# EAGLE board main (EAGLE 6.1)
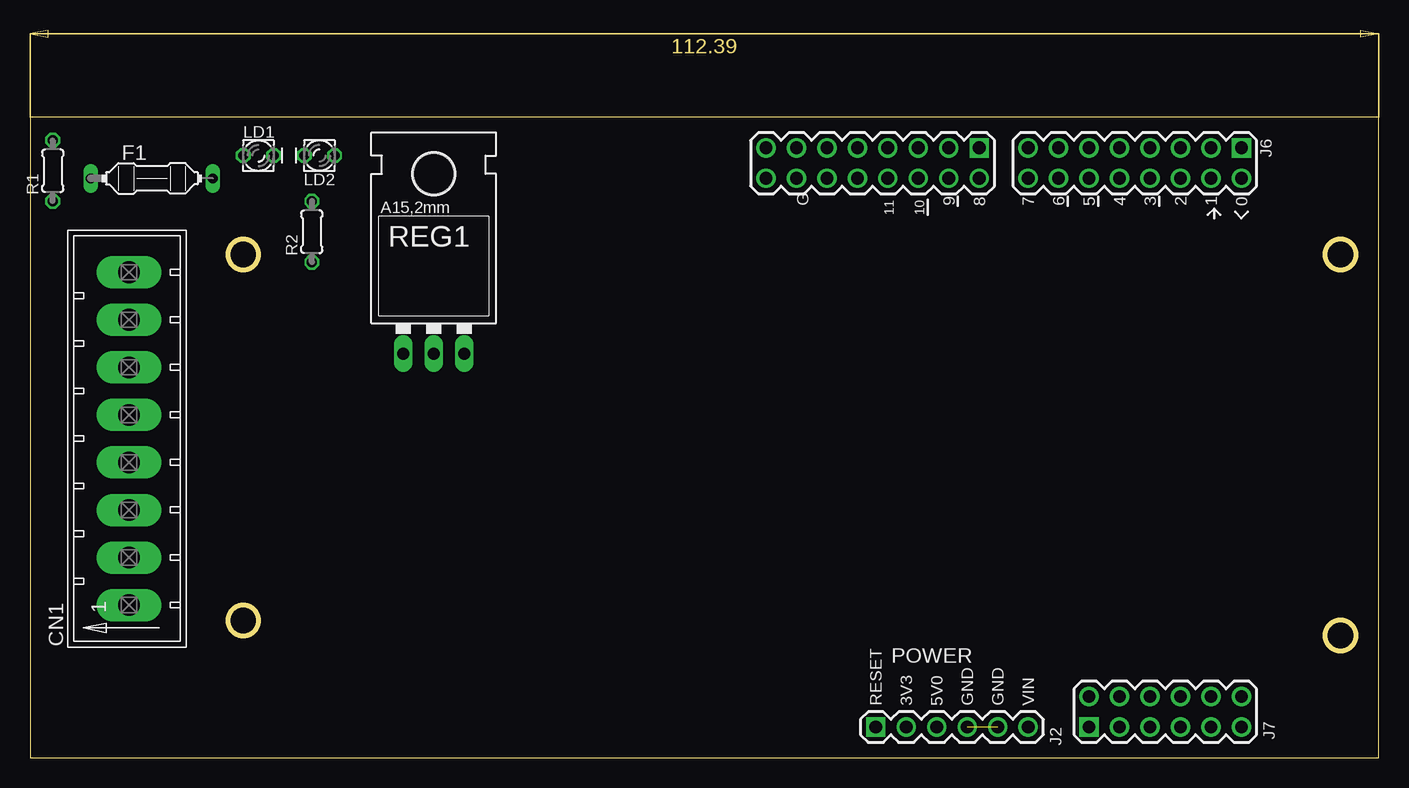
[diagram p0: board, top side]
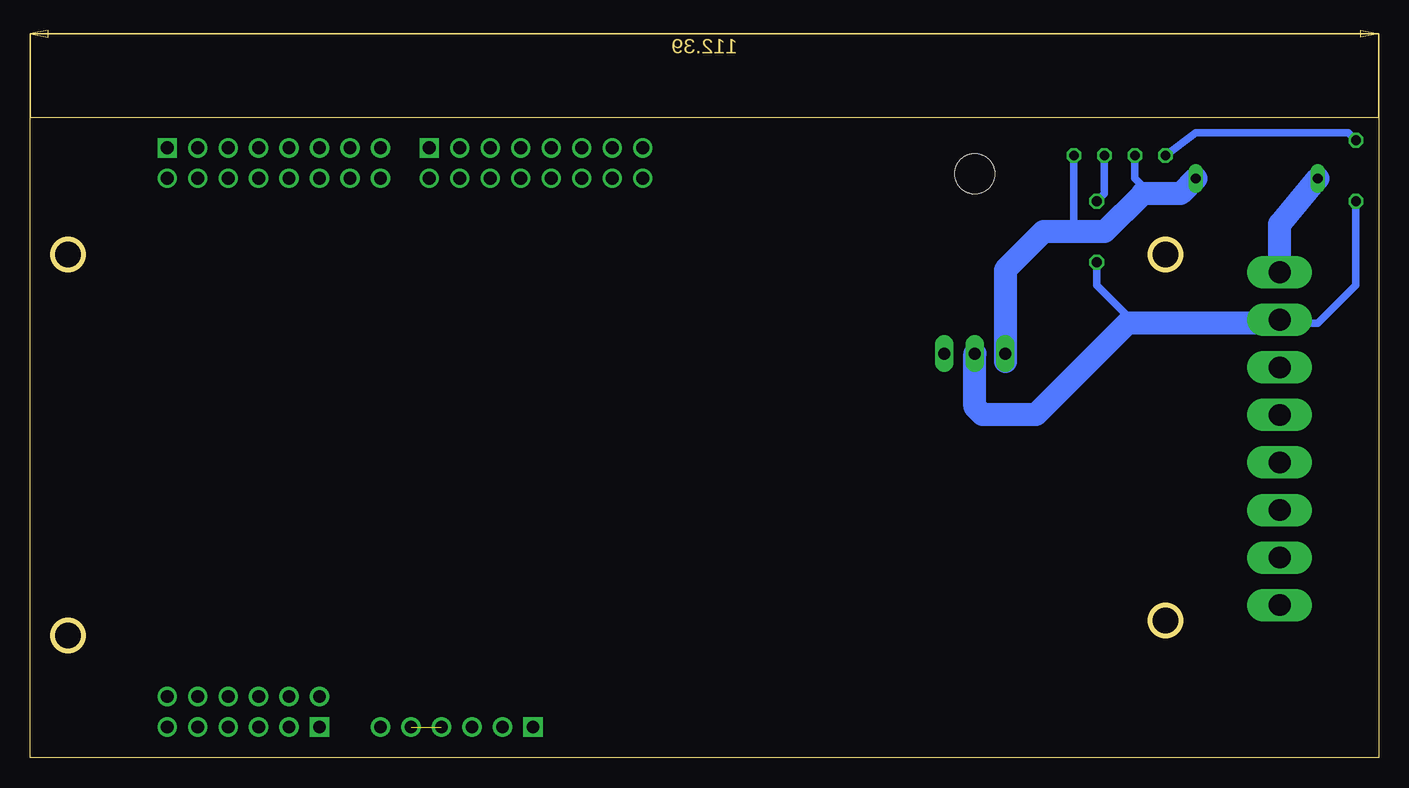
[diagram p1: board, bottom side, seen from below]

Size 112.39 x 53.34 mm. Coordinates in mm from the lower left corner, seen from the top.
Outline: 0,0 112.39,0 112.39,53.34 0,53.34 0,0
Outline: circle at 17.77,11.43 radius 1.27
Outline: circle at 17.77,41.91 radius 1.27
Outline: circle at 109.21,41.91 radius 1.27
Outline: circle at 109.21,10.16 radius 1.27
Copper layers (1+2*15+16): Top 0.035mm / dielectric 0.2mm / Route2 0.035mm / dielectric 0.2mm / Route15 0.035mm / dielectric 0.2mm / Bottom 0.035mm
Design rules: minimum track width 8mil, minimum drill 0.3mm, track to track 6mil, track to pad 6mil, pad to pad 6mil, via to via 6mil, smd to smd 0mil, copper to edge 10mil, drill to drill 8mil, minimum pad ring 5mil, minimum via ring 5mil, stop-mask expansion 4mil, vias tented up to drill 15mil, thermal gap 6mil

## Footprints (pad centres in the part's own frame; a part is rotated, then mirrored left to right if it is on the bottom)
MT6-8 = drill 1.803 long: 1 2.54,0; 2 6.502,0; 3 10.465,0; 4 14.427,0; 5 18.39,0; 6 22.352,0; 7 26.314,0; 8 30.277,0
PICOFUSE = drill 0.813 long: 1 -5.08,0; 2 5.08,0
HDR-1X6 = drill 1.067 square: 1 0,6.35 | drill 1.067: 2 0,3.81; 3 0,1.27; 4 0,-1.27; 5 0,-3.81; 6 0,-6.35
HDR-2X8 = drill 1.067 square: 1 -1.27,8.89 | drill 1.067: 2 1.27,8.89; 3 -1.27,6.35; 4 1.27,6.35; 5 -1.27,3.81; 6 1.27,3.81; 7 -1.27,1.27; 8 1.27,1.27; 9 -1.27,-1.27; 10 1.27,-1.27; 11 -1.27,-3.81; 12 1.27,-3.81; 13 -1.27,-6.35; 14 1.27,-6.35; 15 -1.27,-8.89; 16 1.27,-8.89
HDR-2X6 = drill 1.067 square: 1 -1.27,6.35 | drill 1.067: 2 1.27,6.35; 3 -1.27,3.81; 4 1.27,3.81; 5 -1.27,1.27; 6 1.27,1.27; 7 -1.27,-1.27; 8 1.27,-1.27; 9 -1.27,-3.81; 10 1.27,-3.81; 11 -1.27,-6.35; 12 1.27,-6.35
LD260 = drill 0.813 octagon: A -1.27,0; K 1.27,0
0204/5 = drill 0.813 octagon: 1 -2.54,0; 2 2.54,0
78XXL = drill 1.016 long: GND 0,-3.81; IN -2.54,-3.81; OUT 2.54,-3.81 | hole 3.302: 0,11.176

## Placement (x,y rotation side)
CN1  [MT6-8]  8.24,10.16 90 top
F1  1A  [PICOFUSE]  10.15,48.26 0 top
J2  HDR-1X6  [HDR-1X6]  76.82,2.54 90 top
J5  HDR-2X8  [HDR-2X8]  70.22,49.53 270 top
J6  HDR-2X8  [HDR-2X8]  92.06,49.53 270 top
J7  HDR-2X6  [HDR-2X6]  94.6,3.81 90 top
LD1  [LD260]  19.04,50.16 0 top
LD2  [LD260]  24.12,50.16 180 top
R1  10K  [0204/5]  1.89,48.9 90 top
R2  2.2K  [0204/5]  23.48,43.81 90 top
REG1  5V  [78XXL]  33.64,37.47 0 top

## Library data of the parts
CN1 = con-amp-mt6
F1 = fuse
J2 J5-J7 = Mechanical
LD1 LD2 = led
R1 R2 = rcl
REG1 = v-reg

## Nets
S$1: F1.1
S$3: F1.2 LD1.K LD2.A
S$4: LD1.A R1.2
S$7: LD2.K R2.2
S$8: R1.1 R2.1 REG1.GND
S$24: J2.4 J2.5

## Tracks (layer width: path | path; a pad name or v marks a point on that pad's centre or on a via)
S$1
  Bottom 1.93: 8.24,40.64 8.24,44.45 F1.1
S$3
  Bottom 0.61: 16.5,46.99 19.67,47.62 20.31,48.26 LD1.K | 23.48,43.81 25.39,43.81 LD2.A
  Bottom 1.93: F1.2 16.5,46.99 19.67,46.99 22.85,43.81 23.48,43.81 27.93,43.81 31.1,40.64 31.1,33.02
S$4
  Bottom 0.61: LD1.A 15.23,52.07 2.53,52.07 R1.2
S$7
  Bottom 0.61: R2.2 22.85,46.99 LD2.K
S$8
  Bottom 0.61: R2.1 23.48,39.37 20.31,36.2 19.04,36.2 | R1.1 1.89,39.37 5.07,36.2 8.24,36.2
  Bottom 1.93: 8.24,36.2 19.04,36.2 20.94,36.2 28.56,28.57 33.01,28.57 33.64,29.21 REG1.GND
S$24  (1 unrouted)

## Text on the board
tPlace: G | 9 | 8 | 7 | 6 | 5 | 4 | 3 | 2 | 1 | 0 | 11 | 10 | POWER | RESET | 3V3 | 5V0 | GND | GND | VIN